# Altium PCB AVR-TAG.PcbDoc
Units mil, origin at the board's own origin, x right, y up, seen from the top; angles counter-clockwise.
Board outline 1405 x 610 mil, 2 copper layers (Top Layer, Bottom Layer); 2 components, 6 nets, 14 pads, 0 vias.
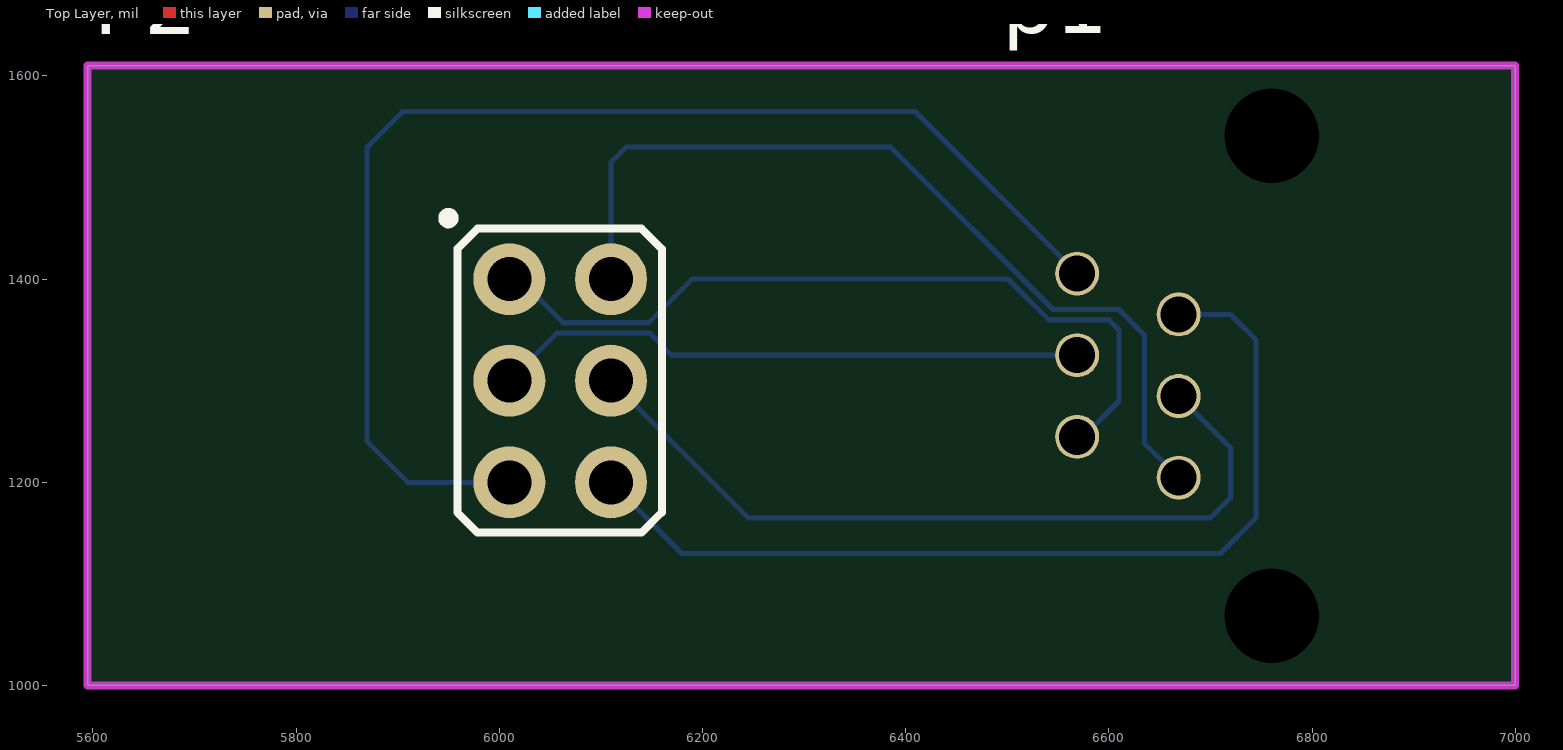
[diagram p0: Top Layer view]
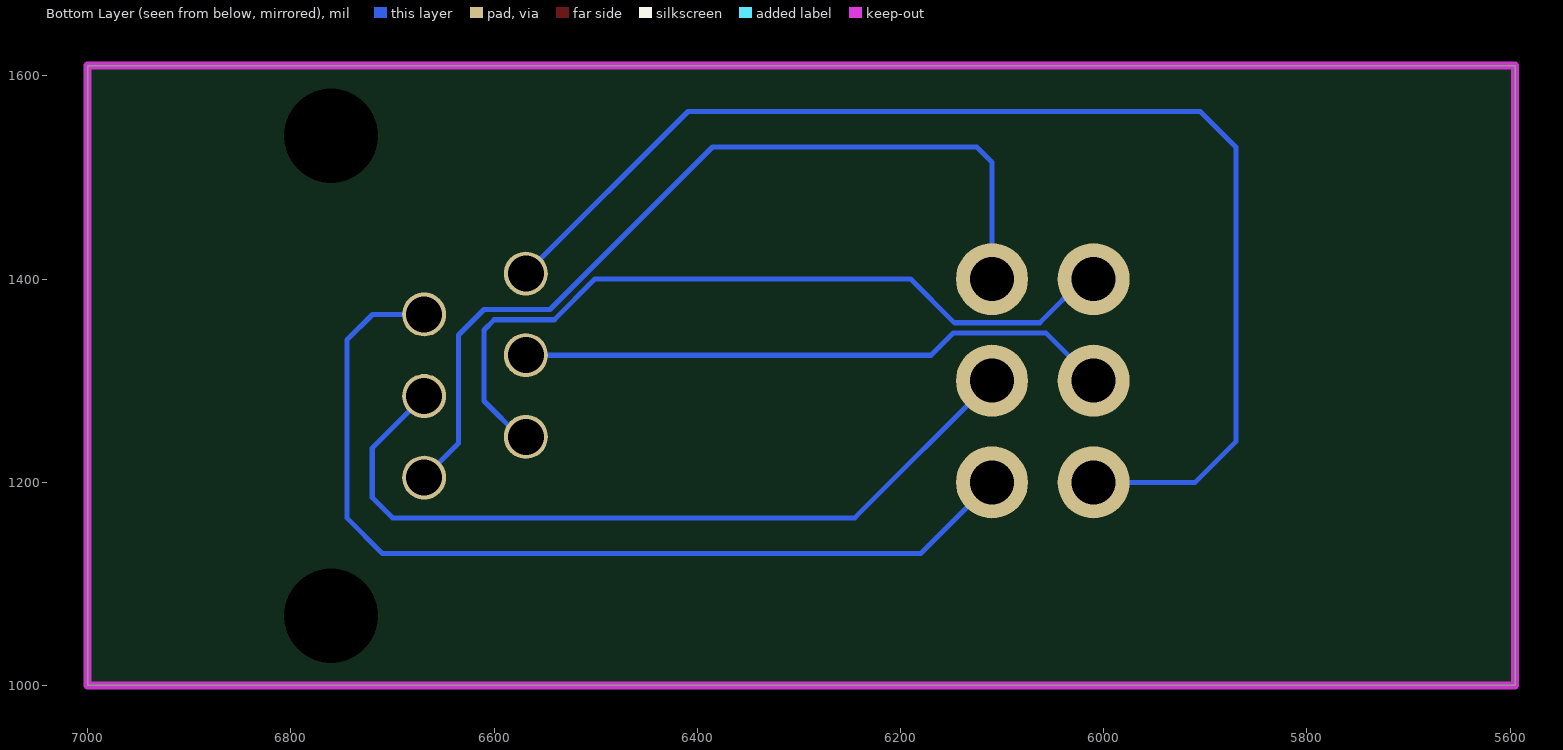
[diagram p1: Bottom Layer view, seen from below]

## Layer stack, top to bottom
Top Solder: solder mask 0.4, Solder Resist, Dk 3.5
Top Layer: signal copper 1.4
Dielectric 1: dielectric 12.6, FR-4, Dk 4.8
Bottom Layer: signal copper 1.4
Bottom Solder: solder mask 0.4, Solder Resist, Dk 3.5

## Board outline
5595,1000 5595,1610 7000,1610 7000,1000

## Design rules (kind name [scope] priority, off if disabled: settings)
Clearance [All] p1: gap=5 ignorepadtopadclearanceinfootprint=FALSE except(0: Arc-Hole Track-Hole SMDPad-Hole THPad-Hole Via-Hole Fill-Hole Poly-Hole Region-Hole Text-Hole; 10: Fill-Fill Fill-Poly Fill-Region Fill-Text Poly-Poly Poly-Region Poly-Text Region-Region Region-Text Text-Text)
PolygonConnect [All] p1: connectstyle=Relief reliefconductorwidth=10 reliefentries=4 polygonreliefangle="90 Angle" airgapwidth=10
RoutingVias [All] p1: holewidth=28 width=50 viastyle="Through Hole" minholewidth=28 minwidth=50 maxholewidth=28 maxwidth=50
SolderMaskExpansion [All] p1: expansion=4
Width [All] p1: maxlimit=20 minlimit=5 preferedwidth=10
30 further rules are at their usual default settings.

## Components (designator, comment, footprint, x,y, rotation, side; value= is the part's Value field where it differs from the comment)
p1 "RJ11-6" RJ11-6pin 6670,1305 r90 top
P2 "2X3 BoxHeader-Angled" "2X3 BOX HEADER-ANGLED" 6060,1300 r90 top

## Footprints (in the part's own frame and the unit in brackets; to place one, negate y for a bottom-side part, rotate by r counter-clockwise, add the part's x,y. Pads: shape width x height; smd on the part's side, far side on the other; paste and mask are expansions set on the pad)
"2X3 BOX HEADER-ANGLED" [mm]
  round 1.8 hole 1.1: 1(2.54,1.27) 2(2.54,-1.27) 3(0,1.27) 4(0,-1.27) 5(-2.54,1.27) 6(-2.54,-1.27)
  silkscreen extent -3.8,-2.54 4.19,2.92, body extent -7.62,-1.53 7.8,11.73, height 9.4
RJ11-6pin [mm] "6pin version"
  round 0 hole 2.36 unplated: 0(-6,-2.3) 0(6,-2.3)
  round 1.1 hole 0.9: 1(2.55,2.57) 2(1.53,0.03) 3(0.51,2.57) 4(-0.51,0.03) 5(-1.53,2.57) 6(-2.55,0.03)
  body extent -7.2,-8.4 7.2,4.6, height 14.5

## Nets (pads, with @x,y where several pads share a name; then routed paths per layer and width w, separated by ;. In a path a pad name is that pad's centre, name@x,y a point inside that pad or via, vN(x,y) a via of type N, cw(c..) or ccw(c..) an arc to the next point about the centre after c; other vN are vias at no path point)
Netp1_1: p1.1 P2.5 | length 1226
  Bottom Layer w5: P2.5 5910,1200 5870,1240 5870,1530 5905,1565 6409.21,1565 p1.1
Netp1_2: p1.2 P2.6 | length 940.1
  Bottom Layer w5: P2.6 6180,1130 6710,1130 6745,1165 6745,1340 6719.76,1365.24 p1.2
Netp1_3: p1.3 P2.3 | length 587.4
  Bottom Layer w5: P2.3 6057.07,1347.07 6147.93,1347.07 6169.92,1325.08 p1.3
Netp1_4: p1.4 P2.4 | length 795.3
  Bottom Layer w5: P2.4 6245,1165 6700,1165 6720,1185 6720,1233.74 p1.4
Netp1_5: p1.5 P2.1 | length 782.1
  Bottom Layer w5: P2.1 6020,1400 6062.93,1357.07 6147.07,1357.07 6190,1400 6500.86,1400 6540.86,1360 6600,1360 6610,1350 6610,1280 6574.76,1244.76 p1.5
Netp1_6: p1.6 P2.2 | length 877.2
  Bottom Layer w5: P2.2 6110,1515 6125,1530 6385,1530 6545,1370 6610,1370 6635,1345 6635,1238.43 p1.6
pads on no net: p1.0

## Keep-outs
Keep-Out Layer:
  the board outline again, w7.87